# EAGLE board axiom_beta_shield_ESP32_v0.1.ac0f95e5 (EAGLE 7.7.0)
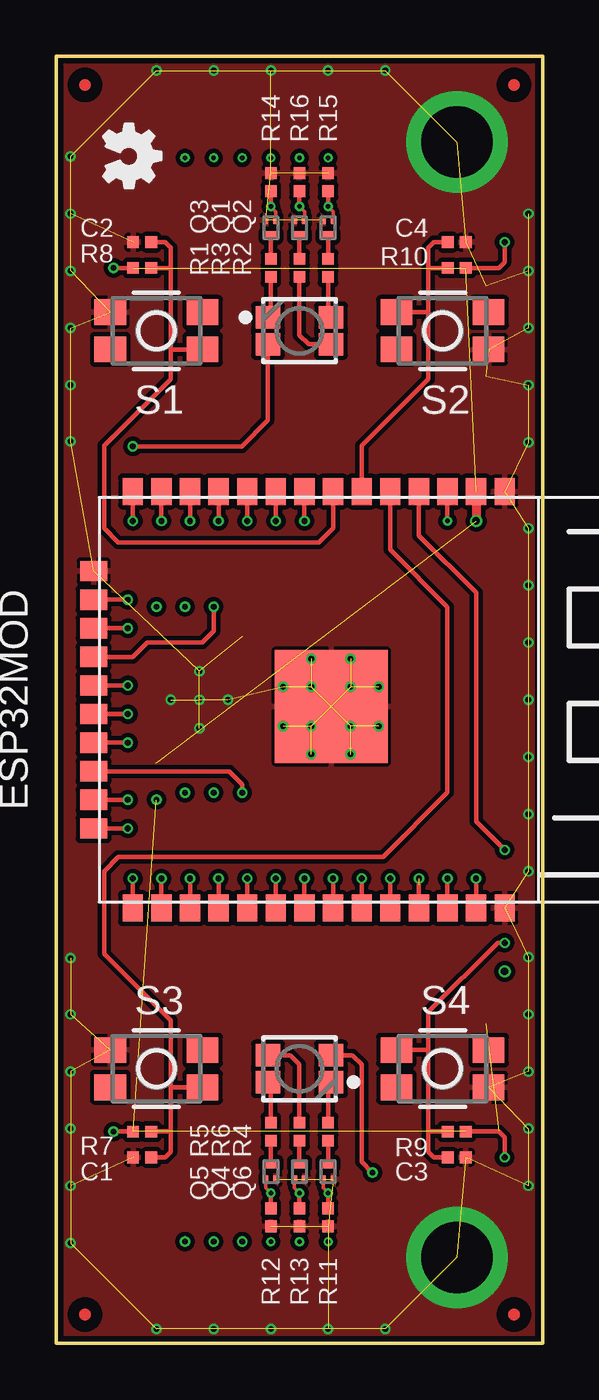
[diagram p0: board, top side]
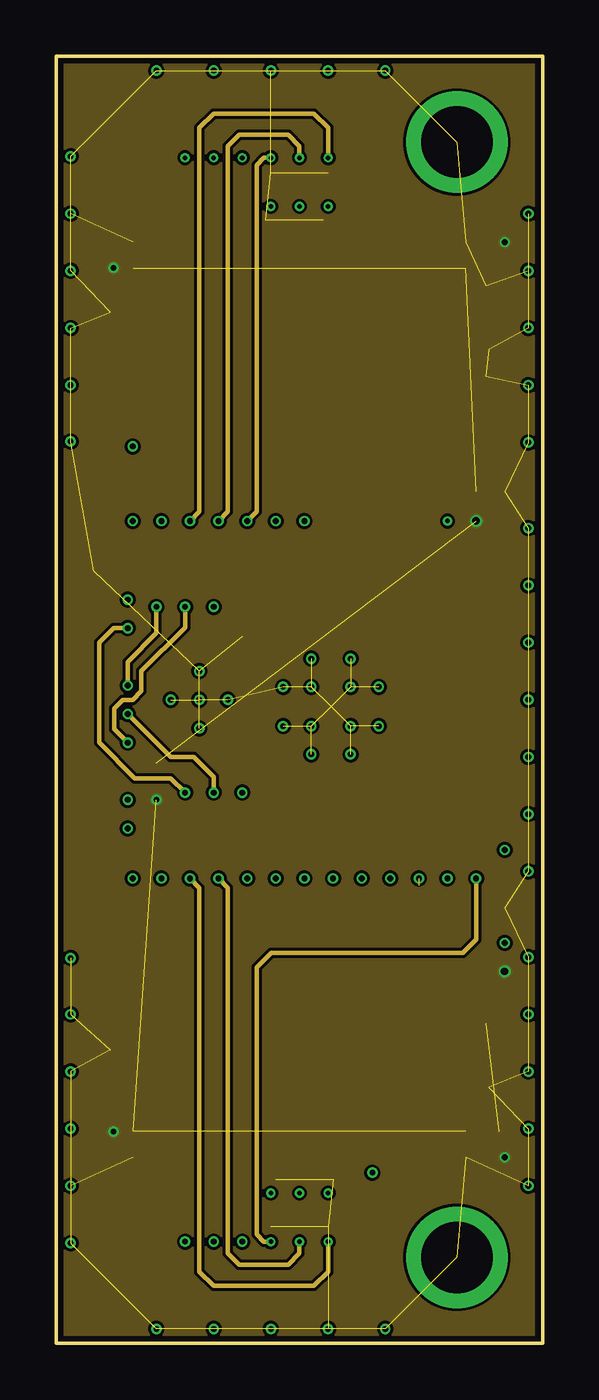
[diagram p1: board, inner layer Route2]
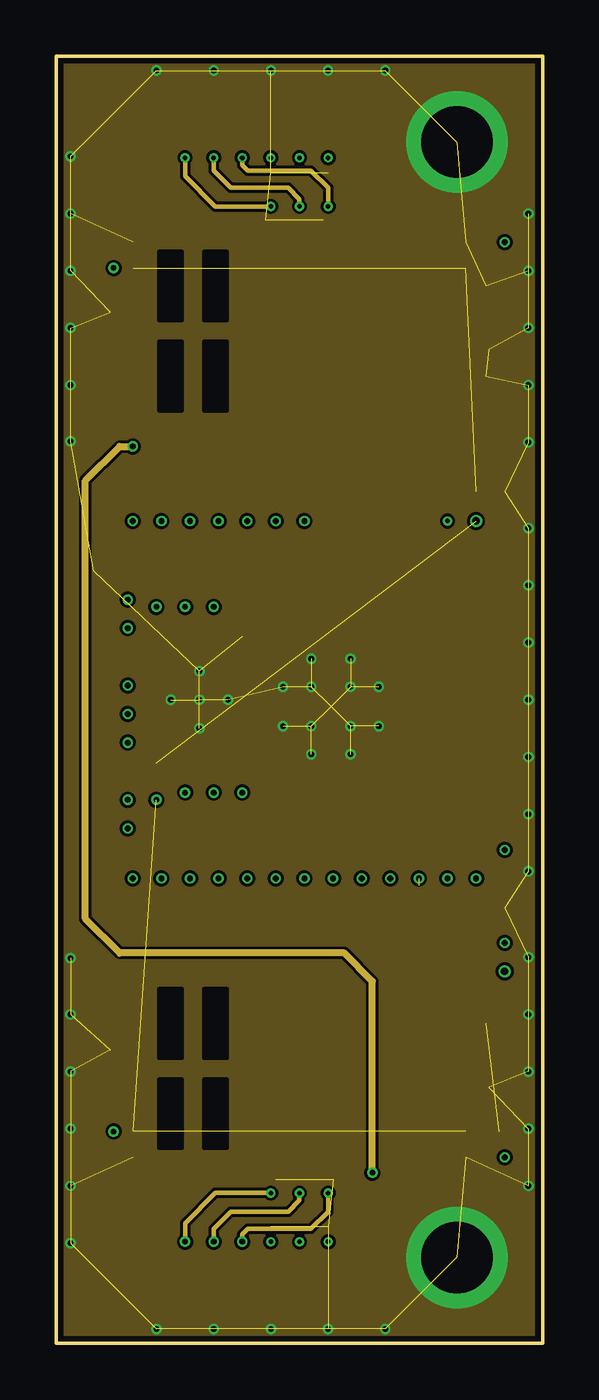
[diagram p2: board, inner layer Route15]
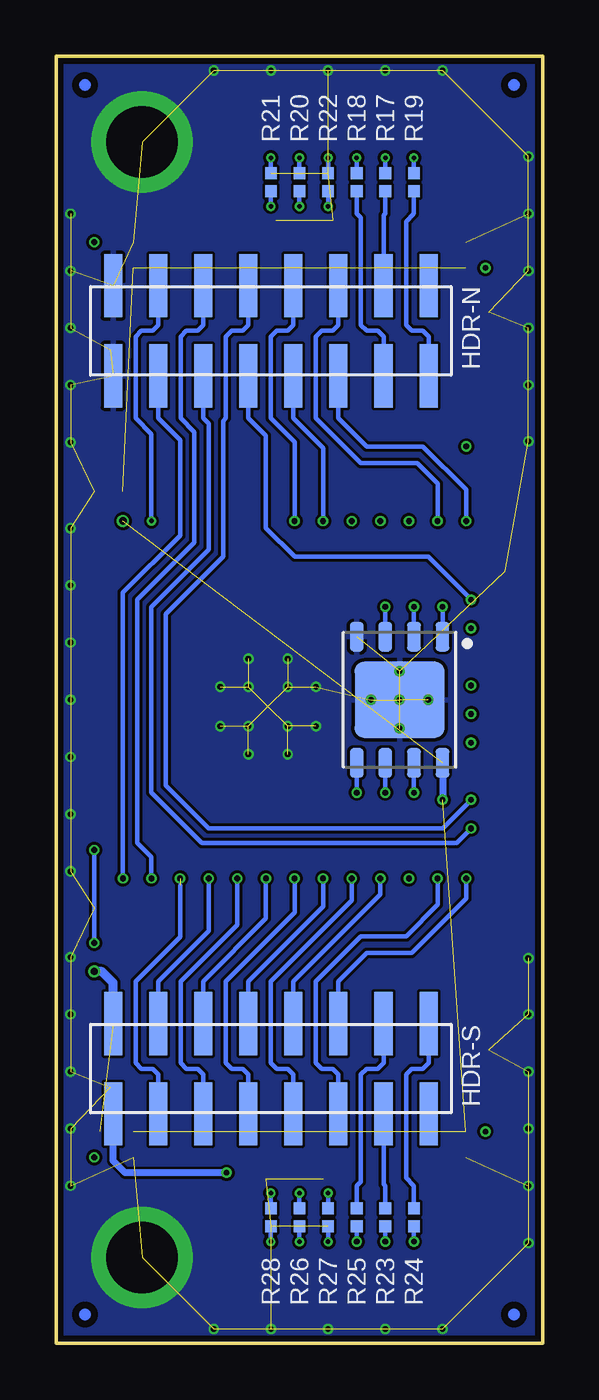
[diagram p3: board, bottom side, seen from below]

Size 21.59 x 57.15 mm. Coordinates in mm from the lower left corner, seen from the top.
Outline: 21.59,57.15 0,57.15 0,0 21.59,0 21.59,57.15
Copper layers (1*2*15*16): Top 0.035559375mm / dielectric 0.17018125mm / Route2 0.01778125mm / dielectric 47mil / Route15 0.01778125mm / dielectric 0.17018125mm / Bottom 0.035559375mm
Design rules "OSHPark-4layer-tuned *": minimum track width 5mil, minimum drill 10mil, track to track 5mil, track to pad 5mil, pad to pad 5mil, via to via 5mil, smd to smd 0mil, copper to edge 10mil, drill to drill 6mil, minimum pad ring 4mil, minimum via ring 4mil, stop-mask expansion 2mil, vias tented up to drill 50mil, thermal gap 6mil
Net classes: 0 default: width 0.152 mm, drill 0.254 mm; 1 power: width 0.152 mm, drill 0.254 mm
tKeepout: area 15.3,50.8 to 20.3,55.8; area 15.3,1.3 to 20.3,6.3
bKeepout: area 15.3,50.8 to 20.3,55.8; area 15.3,1.3 to 20.3,6.3
tRestrict: area 19.8,0.7 to 20.9,1.8; area 19.8,55.3 to 20.9,56.4; area 0.7,55.3 to 1.8,56.4; area 0.7,0.7 to 1.8,1.8
bRestrict: area 19.8,0.7 to 20.9,1.8; area 19.8,55.3 to 20.9,56.4; area 0.7,55.3 to 1.8,56.4; area 0.7,0.7 to 1.8,1.8

## Footprints (pad centres in the part's own frame; a part is rotated, then mirrored left to right if it is on the bottom)
0402-C = smd 0.52 x 0.52: 1 -0.4,0; 2 0.4,0
2X08M_SMD = smd 0.8 x 2.8: 1 -7,-2; 2 -7,2; 3 -5,-2; 4 -5,2; 5 -3,-2; 6 -3,2; 7 -1,-2; 8 -1,2; 9 1,-2; 10 1,2; 11 3,-2; 12 3,2; 13 5,-2; 14 5,2; 15 7,-2; 16 7,2
RGBLED_PLCC4 = smd 1.1 x 1: 1 -1.4,0.6; 2 -1.4,-0.6; 3 1.4,-0.6; 4 1.4,0.6
SOT883(B) = smd 0.4 x 0.25: 1 -0.35,0.225; 2 -0.35,-0.225 | smd 0.4 x 0.7: 3 0.35,0
3X4MM = smd 1.4 x 1.15: 1 -2.05,0.825; 2 2.05,0.825; 3 -2.05,-0.825; 4 2.05,-0.825
ESP32MOD = smd 5 x 5: 0 0.3,10.3 | smd 1.2 x 0.9: 1 -9.25,18; 2 -9.25,16.73; 3 -9.25,15.46; 4 -9.25,14.19; 5 -9.25,12.92; 6 -9.25,11.65; 7 -9.25,10.38; 8 -9.25,9.11; 9 -9.25,7.84; 10 -9.25,6.57; 11 -9.25,5.3; 12 -9.25,4.03; 13 -9.25,2.76; 14 -9.25,1.49; 25 9.25,1.49; 26 9.25,2.76; 27 9.25,4.03; 28 9.25,5.3; 29 9.25,6.57; 30 9.25,7.84; 31 9.25,9.11; 32 9.25,10.38; 33 9.25,11.65; 34 9.25,12.92; 35 9.25,14.19; 36 9.25,15.46; 37 9.25,16.73; 38 9.25,18 | smd 0.9 x 1.2: 15 -5.715,-0.25; 16 -4.445,-0.25; 17 -3.175,-0.25; 18 -1.905,-0.25; 19 -0.635,-0.25; 20 0.635,-0.25; 21 1.905,-0.25; 22 3.175,-0.25; 23 4.445,-0.25; 24 5.715,-0.25
WSON127P600X500-8N = smd 1.3 x 0.6: 1 -2.8,1.905; 2 -2.8,0.635; 3 -2.8,-0.635; 4 -2.8,-1.905; 5 2.8,-1.905; 6 2.8,-0.635; 7 2.8,0.635; 8 2.8,1.905 | smd 3.4 x 4: PAD 0,0

## Placement (x,y rotation side)
C1  [0402-C]  3.81,8.25 180 top
C2  [0402-C]  3.81,48.89 180 top
C3  [0402-C]  17.78,8.25 0 top
C4  [0402-C]  17.78,48.89 0 top
HDR-N  [2X08M_SMD]  12.06,44.96 0 bottom  (not fitted)
HDR-S  [2X08M_SMD]  12.06,12.19 0 bottom  (not fitted)
LED1  [RGBLED_PLCC4]  10.79,44.96 0 top
LED2  [RGBLED_PLCC4]  10.79,12.19 180 top
LOGO1  OSHW_LOGO_FILLX0100-NT  [OSHW_FILLX100_NOTEXT]  2.1,54.13 270 top
Q1  PMZB290UNE  [SOT883(B)]  10.79,49.53 270 top
Q2  PMZB290UNE  [SOT883(B)]  12.06,49.53 270 top
Q3  PMZB290UNE  [SOT883(B)]  9.53,49.53 270 top
Q4  PMZB290UNE  [SOT883(B)]  10.79,7.62 90 top
Q5  PMZB290UNE  [SOT883(B)]  9.53,7.62 90 top
Q6  PMZB290UNE  [SOT883(B)]  12.06,7.62 90 top
R1  [0402-C]  9.53,47.75 270 top
R2  [0402-C]  12.06,47.75 270 top
R3  [0402-C]  10.79,47.75 270 top
R4  [0402-C]  12.06,9.4 90 top
R5  [0402-C]  9.53,9.4 90 top
R6  [0402-C]  10.79,9.4 90 top
R7  [0402-C]  3.81,9.4 180 top
R8  [0402-C]  3.81,47.75 180 top
R9  [0402-C]  17.78,9.4 0 top
R10  [0402-C]  17.78,47.75 0 top
R11  [0402-C]  12.06,5.59 90 top
R12  [0402-C]  9.53,5.59 90 top
R13  [0402-C]  10.79,5.59 90 top
R14  [0402-C]  9.53,51.56 270 top
R15  [0402-C]  12.06,51.56 270 top
R16  [0402-C]  10.79,51.56 270 top
R17  [0402-C]  6.98,51.56 270 bottom
R18  [0402-C]  8.25,51.56 270 bottom
R19  [0402-C]  5.71,51.56 270 bottom
R20  [0402-C]  10.79,51.56 90 bottom
R21  [0402-C]  12.06,51.56 90 bottom
R22  [0402-C]  9.53,51.56 90 bottom
R23  [0402-C]  6.98,5.59 90 bottom
R24  [0402-C]  5.71,5.59 90 bottom
R25  [0402-C]  8.25,5.59 90 bottom
R26  [0402-C]  10.79,5.59 270 bottom
R27  [0402-C]  9.53,5.59 270 bottom
R28  [0402-C]  12.06,5.59 270 bottom
S1  DTSM-6  [3X4MM]  4.45,44.96 0 top  (not fitted)
S2  DTSM-6  [3X4MM]  17.14,44.96 180 top  (not fitted)
S3  DTSM-6  [3X4MM]  4.45,12.19 0 top  (not fitted)
S4  DTSM-6  [3X4MM]  17.14,12.19 180 top  (not fitted)
U1  ESP32MOD  [ESP32MOD]  1.9,28.57 270 top
U$1  IS25LP128  [WSON127P600X500-8N]  6.35,28.57 270 bottom

## Library data of the parts
C1-C4 R1-R28 = generic-rcl
HDR-N HDR-S = pincon
LED1 LED2 = microbuilder
LOGO1 = ohw-logo
Q1-Q6 = transistor
S1-S4 = switch
U1 = ESP32
U$1 = eeprom

## Nets
B1: Q1.3 R3.1
B2: Q4.3 R6.1
G1: Q2.3 R2.1
G2: Q5.3 R5.1
GND: C1.2 C2.2 C3.2 C4.2 HDR-N.1 HDR-N.2 Q1.2 Q2.2 Q3.2 Q4.2 Q5.2 Q6.2 R11.1 R12.1 R13.1 R14.1 R15.1 R16.1 S1.1 S2.1 S3.1 S4.1 U1.0 U1.1 U1.15 U1.38 U$1.4 U$1.PAD
LED1_B: R20.2 U1.11
LED1_G: R21.2 U1.12
LED1_R: R22.2 U1.10
LED2_R: R28.2 U1.27
N$34: LED1.1 R1.2
N$35: LED1.4 R2.2
N$36: LED1.3 R3.2
N$37: LED2.1 R4.2
N$38: LED2.4 R5.2
N$39: LED2.3 R6.2
N$53: Q3.1 R14.2 R19.1 R22.1
N$54: Q2.1 R15.2 R18.1 R21.1
N$55: Q1.1 R16.2 R17.1 R20.1
N$103: Q4.1 R13.2 R23.1 R26.1
N$104: Q5.1 R12.2 R24.1 R27.1
N$105: Q6.1 R11.2 R25.1 R28.1
R1: Q3.3 R1.1
R2: Q6.3 R4.1
S1: C2.1 R8.1 S1.4 U1.7
S2: C4.1 R10.1 S2.4 U1.6
S3: C1.1 R7.1 S3.4 U1.5
S4: C3.1 R9.1 S4.4 U1.4
SH_N_IO0: HDR-N.12 U1.13
SH_N_IO1: HDR-N.11 U1.14
SH_N_IO2: HDR-N.10 U1.8
SH_N_IO3: HDR-N.9 U1.9
SH_N_IO4: HDR-N.8 U1.23
SH_N_IO5: HDR-N.7 U1.16
SH_N_IO6: HDR-N.6 U1.36
SH_N_IO7: HDR-N.5 U1.24
SH_N_IO8: HDR-N.4 U1.3
SH_N_IO9: HDR-N.3 R27.2 U1.37
SH_S_IO0: HDR-S.12 U1.25
SH_S_IO1: HDR-S.11 U1.26
SH_S_IO2: HDR-S.10 R26.2 U1.28
SH_S_IO3: HDR-S.9 U1.29
SH_S_IO4: HDR-S.8 U1.30
SH_S_IO5: HDR-S.7 U1.31
SH_S_IO6: HDR-S.6 U1.32
SH_S_IO7: HDR-S.5 U1.33
SH_S_IO8: HDR-S.4 U1.34
SH_S_IO9: HDR-S.3 U1.35
SPI: U1.22 U$1.5
SPICLK: U1.20 U$1.6
SPICS0: U1.19 U$1.1
SPIHD: U1.17 U$1.7
SPIQ: U1.21 U$1.2
SPIWP: U1.18 U$1.3
VCC: HDR-S.2 R7.2 R8.2 R9.2 R10.2 U1.2 U$1.8
VDD: HDR-S.1 LED1.2 LED2.2
XX1_N: HDR-N.14 R17.2
XX1_P: HDR-N.16
XX2_N: HDR-N.13 R18.2
XX2_P: HDR-N.15 R19.2
XX3_N: HDR-S.15
XX3_P: HDR-S.13 R23.2
XX4_N: HDR-S.16 R24.2
XX4_P: HDR-S.14 R25.2

## Tracks (layer width: path | path; a pad name or v marks a point on that pad's centre or on a via)
B1
  Top 0.203: R3.1 Q1.3
B2
  Top 0.203: R6.1 Q4.3
G1
  Top 0.203: R2.1 Q2.3
G2
  Top 0.203: R5.1 Q5.3
GND  (via drill 0.25, 3.17 pad 4.5)  (84 unrouted)
  other vias: 17.78,3.81 17.78,53.34 20.95,50.16 20.95,47.62 20.95,45.09 20.95,42.55 20.95,9.52 20.95,6.98 14.61,0.63 12.06,0.63 9.53,0.63 6.98,0.63 4.45,0.63 0.63,6.98 0.63,9.52 0.63,42.55 0.63,45.09 0.63,47.62 0.63,50.16 0.63,52.7 0.63,4.45 14.61,56.52 12.06,56.52 9.53,56.52 6.98,56.52 4.45,56.52 6.35,28.57 7.62,28.57 5.08,28.57 6.35,27.3 6.35,29.84 11.31,30.4 13.06,30.4 14.31,29.15 13.06,29.15 11.31,29.15 10.06,29.15 10.06,27.4 11.31,27.4 13.06,27.4 14.31,27.4 11.31,26.15 13.06,26.15 0.63,12.06 0.63,14.6 20.95,12.06 20.95,14.6 0.63,40.05 0.63,17.1 20.95,17.14 20.95,40 20.95,33.66 20.95,23.49 20.95,28.57 20.95,31.11 20.95,26.04 20.95,36.2 20.95,20.95
  pour Top (isolate 0.203, rank 3): 21.59,0 0,0 0,57.15 21.59,57.15
  pour Bottom (rank 3): 21.59,0 0,0 0,57.15 21.59,57.15
  pour Route15 (rank 3): 21.59,0 0,0 0,57.15 21.59,57.15
LED1_B  (via drill 0.2, 0.25)
  Top 0.203: U1.11 v7.21,36.51
  Route2 0.203: v10.79,52.64 10.79,53.15 10.29,53.66 8.13,53.66 7.62,53.15 7.62,36.93 v7.21,36.51
  Bottom 0.203: R20.2 v10.79,52.64
LED1_G  (via drill 0.2, 0.25)
  Top 0.203: U1.12 v5.93,36.51
  Route2 0.203: v12.06,52.64 12.06,53.97 11.43,54.61 6.98,54.61 6.35,53.97 6.35,36.93 v5.93,36.51
  Bottom 0.203: R21.2 v12.06,52.64
LED1_R  (via drill 0.2, 0.25)
  Top 0.203: U1.10 v8.47,36.51
  Route2 0.203: v9.53,52.64 9.21,52.64 8.89,52.32 8.89,36.93 v8.47,36.51
  Bottom 0.203: R22.2 v9.53,52.64
LED2_R  (via drill 0.2, 0.25)
  Top 0.203: U1.27 v5.93,20.64
  Route2 0.203: v12.06,4.51 12.06,3.18 11.43,2.54 6.98,2.54 6.35,3.18 6.35,20.22 v5.93,20.64
  Bottom 0.203: R28.2 v12.06,4.51
N$21
  cutout Route15: 4.56,15.72 5.56,15.72 5.56,12.67 4.56,12.67
  cutout Route15: 6.56,15.72 7.56,15.72 7.56,12.67 6.56,12.67
  cutout Route15: 6.56,11.72 7.56,11.72 7.56,8.68 6.56,8.68
  cutout Route15: 4.56,11.72 5.56,11.72 5.56,8.68 4.56,8.68
  cutout Route15: 5.56,45.42 4.56,45.42 4.56,48.47 5.56,48.47
  cutout Route15: 7.56,45.42 6.56,45.42 6.56,48.47 7.56,48.47
  cutout Route15: 7.56,41.42 6.56,41.42 6.56,44.48 7.56,44.48
  cutout Route15: 5.56,41.42 4.56,41.42 4.56,44.48 5.56,44.48
N$34
  Top 0.203: R1.2 9.53,45.69 LED1.1
N$35
  Top 0.203: R2.2 12.06,45.69 LED1.4
N$36
  Top 0.203: R3.2 10.79,44.77 11.2,44.36 LED1.3
N$37
  Top 0.203: R4.2 12.06,11.46 LED2.1
N$38
  Top 0.203: R5.2 9.53,11.46 LED2.4
N$39
  Top 0.203: R6.2 10.79,12.38 10.39,12.79 LED2.3
N$53  (via drill 0.2)
  Top 0.152: v9.53,50.48 9.75,50.26 Q3.1
  Top 0.203: v9.53,50.48 R22.1
  Route15 0.203: v5.71,52.64 5.71,51.82 7.05,50.48 v9.53,50.48
  Bottom 0.203: R19.1 v5.71,52.64 | R22.1 v9.53,50.48
N$54  (via drill 0.2)
  Top 0.152: v12.06,50.48 12.29,50.26 Q2.1
  Top 0.203: v12.06,50.48 R21.1
  Route15 0.203: v8.25,52.64 8.25,52.32 8.51,52.07 11.3,52.07 12.06,51.31 v12.06,50.48
  Bottom 0.203: R18.1 v8.25,52.64 | R21.1 v12.06,50.48
N$55  (via drill 0.2)
  Top 0.152: v10.79,50.48 11.02,50.26 Q1.1
  Top 0.203: v10.79,50.48 R20.1
  Route15 0.203: v6.98,52.64 6.98,52.07 7.75,51.31 10.29,51.31 10.79,50.8 v10.79,50.48
  Bottom 0.203: R17.1 v6.98,52.64 | R20.1 v10.79,50.48
N$103  (via drill 0.2, 0.25)
  Top 0.152: Q4.1 10.57,6.89 v10.79,6.67
  Top 0.203: v10.79,6.67 R26.1
  Route15 0.203: v6.98,4.51 6.98,5.08 7.75,5.84 10.29,5.84 10.79,6.35 v10.79,6.67
  Bottom 0.203: R26.1 v10.79,6.67 | R23.1 v6.98,4.51
N$104  (via drill 0.2, 0.25)
  Top 0.152: Q5.1 9.3,6.89 v9.53,6.67
  Top 0.203: v9.53,6.67 R27.1
  Route15 0.203: v5.71,4.51 5.71,5.33 7.05,6.67 v9.53,6.67
  Bottom 0.203: R27.1 v9.53,6.67 | R24.1 v5.71,4.51
N$105  (via drill 0.2, 0.25)
  Top 0.152: Q6.1 11.84,6.89 v12.06,6.67
  Top 0.203: v12.06,6.67 R28.1
  Route15 0.203: v8.25,4.51 8.25,4.83 8.51,5.08 11.3,5.08 12.06,5.84 v12.06,6.67
  Bottom 0.203: R28.1 v12.06,6.67 | R25.1 v8.25,4.51
R1
  Top 0.203: R1.1 Q3.3
R2
  Top 0.203: R4.1 Q6.3
S1
  Top 0.203: U1.7 12.29,36.2 11.65,35.56 2.76,35.56 2.12,36.2 2.12,39.87 5.08,42.83 5.08,44.13 | R8.1 5.08,47.75 | 5.08,47.75 5.08,44.13 | 5.08,44.13 S1.4 | C2.1 4.83,48.89 5.08,48.64 5.08,47.75
S2
  Top 0.203: U1.6 13.55,39.87 16.51,42.83 16.51,45.78 | R10.1 16.51,47.75 | 16.51,47.75 16.51,45.78 | 16.51,45.78 S2.4 | C4.1 16.76,48.89 16.51,48.64 16.51,47.75
S3
  Top 0.203: U1.5 14.82,35.24 17.37,32.7 17.37,24.45 14.51,21.59 2.76,21.59 2.12,20.95 2.12,17.28 5.08,14.32 5.08,11.37 | C1.1 4.83,8.25 5.08,8.51 5.08,9.4 | 5.08,9.4 5.08,11.37 | 5.08,11.37 S3.4 | R7.1 5.08,9.4
S4  (via drill 0.25)
  Top 0.203: U1.4 16.09,35.88 18.63,33.34 18.63,23.18 v19.91,21.91 | S4.4 16.51,13.02 | 16.51,13.02 16.51,9.4 | 16.51,9.4 R9.1 | C3.1 16.76,8.25 16.51,8.51 16.51,9.4 | 16.51,13.02 16.51,14.7 19.59,17.78 v19.91,17.78
  Bottom 0.203: v19.91,21.91 v19.91,17.78
SH_N_IO0  (via drill 0.25)
  Top 0.203: U1.13 v4.67,36.51
  Bottom 0.203: HDR-N.12 9.06,45.21 9.32,44.96 9.81,44.96 10.06,44.7 10.06,41.08 8.06,39.08 5.56,39.08 4.67,38.17 v4.67,36.51
SH_N_IO1  (via drill 0.25)
  Top 0.203: U1.14 v3.39,36.51
  Bottom 0.203: HDR-N.11 9.06,41.08 7.81,39.83 5.31,39.83 3.39,37.91 v3.39,36.51
SH_N_IO2  (via drill 0.25)
  Top 0.203: U1.8 v11.02,36.51
  Bottom 0.203: HDR-N.10 11.06,45.21 11.32,44.96 11.81,44.96 12.06,44.7 12.06,41.08 11.02,40.02 v11.02,36.51
SH_N_IO3  (via drill 0.25)
  Top 0.203: U1.9 v9.74,36.51
  Bottom 0.203: HDR-N.9 11.06,41.08 9.74,39.75 v9.74,36.51
SH_N_IO4  (via drill 0.25)
  Top 0.203: U1.23 v3.17,24.13
  Bottom 0.203: HDR-N.8 13.06,45.21 13.32,44.96 13.81,44.96 14.06,44.7 14.06,41.08 14.19,40.95 14.19,34.92 16.73,32.38 16.73,24.77 14.82,22.86 4.45,22.86 v3.17,24.13
SH_N_IO5  (via drill 0.25)
  Top 0.203: U1.16 v3.17,33.02
  Bottom 0.203: HDR-N.7 13.06,41.08 12.29,40.3 12.29,36.2 11.02,34.92 5.08,34.92 v3.17,33.02
SH_N_IO6  (via drill 0.25)
  Top 0.203: U1.36 v17.37,20.64
  Bottom 0.203: HDR-N.6 15.06,45.21 15.32,44.96 15.81,44.96 16.06,44.7 16.06,41.08 15.46,40.47 15.46,35.56 18,33.02 18,22.23 17.37,21.59 v17.37,20.64
SH_N_IO7  (via drill 0.25)
  Top 0.203: U1.24 v3.17,22.86
  Bottom 0.203: HDR-N.5 15.06,41.08 14.82,40.84 14.82,35.24 17.37,32.7 17.37,24.45 15.14,22.23 3.81,22.23 v3.17,22.86
SH_N_IO8  (via drill 0.2)
  Top 0.203: U1.3 v17.37,36.51
  Bottom 0.203: HDR-N.4 17.06,45.21 17.32,44.96 17.81,44.96 18.06,44.7 18.06,41.08 17.37,40.38 v17.37,36.51
SH_N_IO9  (via drill 0.2, 0.25)
  Top 0.203: U1.37 v18.63,20.64
  Route2 0.203: v9.53,4.51 9.21,4.51 8.89,4.83 8.89,16.68 9.54,17.32 18.04,17.32 18.63,17.92 v18.63,20.64
  Bottom 0.203: HDR-N.3 17.06,41.08 16.09,40.1 16.09,35.88 18.63,33.34 v18.63,20.64 | R27.2 v9.53,4.51
SH_S_IO0  (via drill 0.25)
  Top 0.203: U1.25 v3.39,20.64
  Bottom 0.203: HDR-S.12 9.06,16.07 7.81,17.32 5.81,17.32 3.39,19.74 v3.39,20.64
SH_S_IO1  (via drill 0.25)
  Top 0.203: U1.26 v4.67,20.64
  Bottom 0.203: HDR-S.11 9.06,11.94 9.32,12.19 9.81,12.19 10.06,12.45 10.06,16.07 8.06,18.07 6.06,18.07 4.67,19.48 v4.67,20.64
SH_S_IO2  (via drill 0.2, 0.25)
  Top 0.203: U1.28 v7.21,20.64
  Route2 0.203: v10.79,4.51 10.79,4 10.29,3.49 8.13,3.49 7.62,4 7.62,20.22 v7.21,20.64
  Bottom 0.203: HDR-S.10 11.06,16.07 7.21,19.93 v7.21,20.64 | R26.2 v10.79,4.51
SH_S_IO3  (via drill 0.25)
  Top 0.203: U1.29 v8.47,20.64
  Bottom 0.203: HDR-S.9 11.06,11.94 11.32,12.19 11.81,12.19 12.06,12.45 12.06,16.07 8.47,19.66 v8.47,20.64
SH_S_IO4  (via drill 0.25)
  Top 0.203: U1.30 v9.74,20.64
  Bottom 0.203: HDR-S.8 13.06,16.07 9.74,19.39 v9.74,20.64
SH_S_IO5  (via drill 0.25)
  Top 0.203: U1.31 v11.02,20.64
  Bottom 0.203: HDR-S.7 13.06,11.94 13.32,12.19 13.81,12.19 14.06,12.45 14.06,16.07 11.02,19.12 v11.02,20.64
SH_S_IO6  (via drill 0.25)
  Top 0.203: U1.32 v12.29,20.64
  Bottom 0.203: HDR-S.6 15.06,16.07 12.29,18.85 v12.29,20.64
SH_S_IO7  (via drill 0.25)
  Top 0.203: U1.33 v13.55,20.64
  Bottom 0.203: HDR-S.5 15.06,11.94 15.32,12.19 15.81,12.19 16.06,12.45 16.06,16.07 13.55,18.59 v13.55,20.64
SH_S_IO8  (via drill 0.25)
  Top 0.203: U1.34 v14.82,20.64
  Bottom 0.203: HDR-S.4 17.06,16.07 14.82,18.31 v14.82,20.64
SH_S_IO9  (via drill 0.25)  (1 unrouted)
  Top 0.203: U1.35 v16.09,20.64
  Bottom 0.203: HDR-S.3 17.06,11.94 17.32,12.19 17.81,12.19 18.06,12.45 18.06,16.07 16.09,18.05 16.09,20.32
SPI  (via drill 0.25)
  Top 0.203: U1.22 7.68,25.4 8.25,24.82 v8.25,24.45
  Bottom 0.203: U$1.5 v8.25,24.45
SPICLK  (via drill 0.25)
  Top 0.203: U1.20 v3.17,27.94
  Route2 0.203: v6.98,24.45 6.98,25.15 6.1,26.04 5.08,26.04 v3.17,27.94
  Bottom 0.203: U$1.6 v6.98,24.45
SPICS0  (via drill 0.25)
  Top 0.203: U1.19 v3.17,29.21
  Route2 0.203: v3.17,29.21 3.17,30.26 4.45,31.53 v4.45,32.7
  Bottom 0.203: U$1.1 v4.45,32.7
SPIHD  (via drill 0.25)
  Top 0.203: U1.17 v3.17,31.75
  Route2 0.203: v3.17,31.75 2.54,31.75 1.9,31.11 1.9,26.67 3.49,25.08 5.08,25.08 v5.71,24.45
  Bottom 0.203: U$1.7 v5.71,24.45
SPIQ  (via drill 0.25)
  Top 0.203: U1.21 v3.17,26.67
  Route2 0.203: v5.71,32.7 5.71,31.78 3.78,29.84 3.78,28.96 3.39,28.57 2.95,28.57 2.57,28.19 2.57,27.27 v3.17,26.67
  Bottom 0.203: U$1.2 v5.71,32.7
SPIWP  (via drill 0.25)
  Top 0.203: v6.98,32.7 6.98,31.62 6.48,31.11 4.03,31.11 3.39,30.48 U1.18
  Bottom 0.203: U$1.3 v6.98,32.7
VCC  (via drill 0.25, 0.33)  (6 unrouted)
  Top 0.203: R8.2 v2.54,47.75 | R10.2 19.65,47.75 19.91,48.01 v19.91,48.89 | R7.2 v2.54,9.4 | R9.2 19.65,9.4 19.91,9.14 v19.91,8.25
  Top 0.406: U1.2 v18.63,36.51
  Bottom 0.305: U$1.8 v4.45,24.13
  Bottom 0.406: HDR-S.2 19.06,16 19.57,16.51 v19.91,16.51
  pour Route2 (rank 3): 21.59,0 0,0 0,57.15 21.59,57.15
VDD  (via drill 0.25)
  Top 0.203: LED1.2 9.39,40.99 8.23,39.83 v3.39,39.83 | LED2.2 13.14,12.79 13.55,12.38 13.55,8.05 v14.04,7.57
  Route15 0.305: v14.04,7.57 14.04,16.07 12.79,17.32 2.81,17.32 1.29,18.85 1.29,38.3 2.81,39.83 v3.39,39.83
  Bottom 0.305: v14.04,7.57 18.54,7.57 19.06,8.11 HDR-S.1
XX1_N
  Bottom 0.203: HDR-N.14 7.06,50.09 6.98,50.16 R17.2
XX2_N
  Bottom 0.203: HDR-N.13 7.06,44.7 7.32,44.96 7.81,44.96 8.06,45.21 8.06,49.97 8.25,50.16 R18.2
XX2_P
  Bottom 0.203: HDR-N.15 5.06,44.7 5.32,44.96 5.81,44.96 6.06,45.21 6.06,49.81 5.71,50.16 R19.2
XX3_P
  Bottom 0.203: HDR-S.13 7.06,7.06 6.98,6.98 R23.2
XX4_N
  Bottom 0.203: HDR-S.16 5.06,12.45 5.32,12.19 5.81,12.19 6.06,11.94 6.06,7.34 5.71,6.98 R24.2
XX4_P
  Bottom 0.203: HDR-S.14 7.06,12.45 7.32,12.19 7.81,12.19 8.06,11.94 8.06,7.18 8.25,6.98 R25.2
(copper drawn outside any net)
  shapes: Bottom circle x4, Top circle x4

## Text on the board
_tSilk: LED1 | ESP-32S / ESP-WROOM-32 | LED2 | V0.1 / R1.0
_bSilk: ESP-32S / ESP-WROOM-32 | Copyright (C) 2017 H.Pötzl / Licensed under CERN OHL v.1.2
tEngrave: AXIOM BETA ESP32 SHIELD / TOP SIDE V0.1 R1.0
bEngrave: AXIOM BETA ESP32 SHIELD / BOTTOM SIDE V0.1 R1.0